# Allegro board fpga_ccd.brd
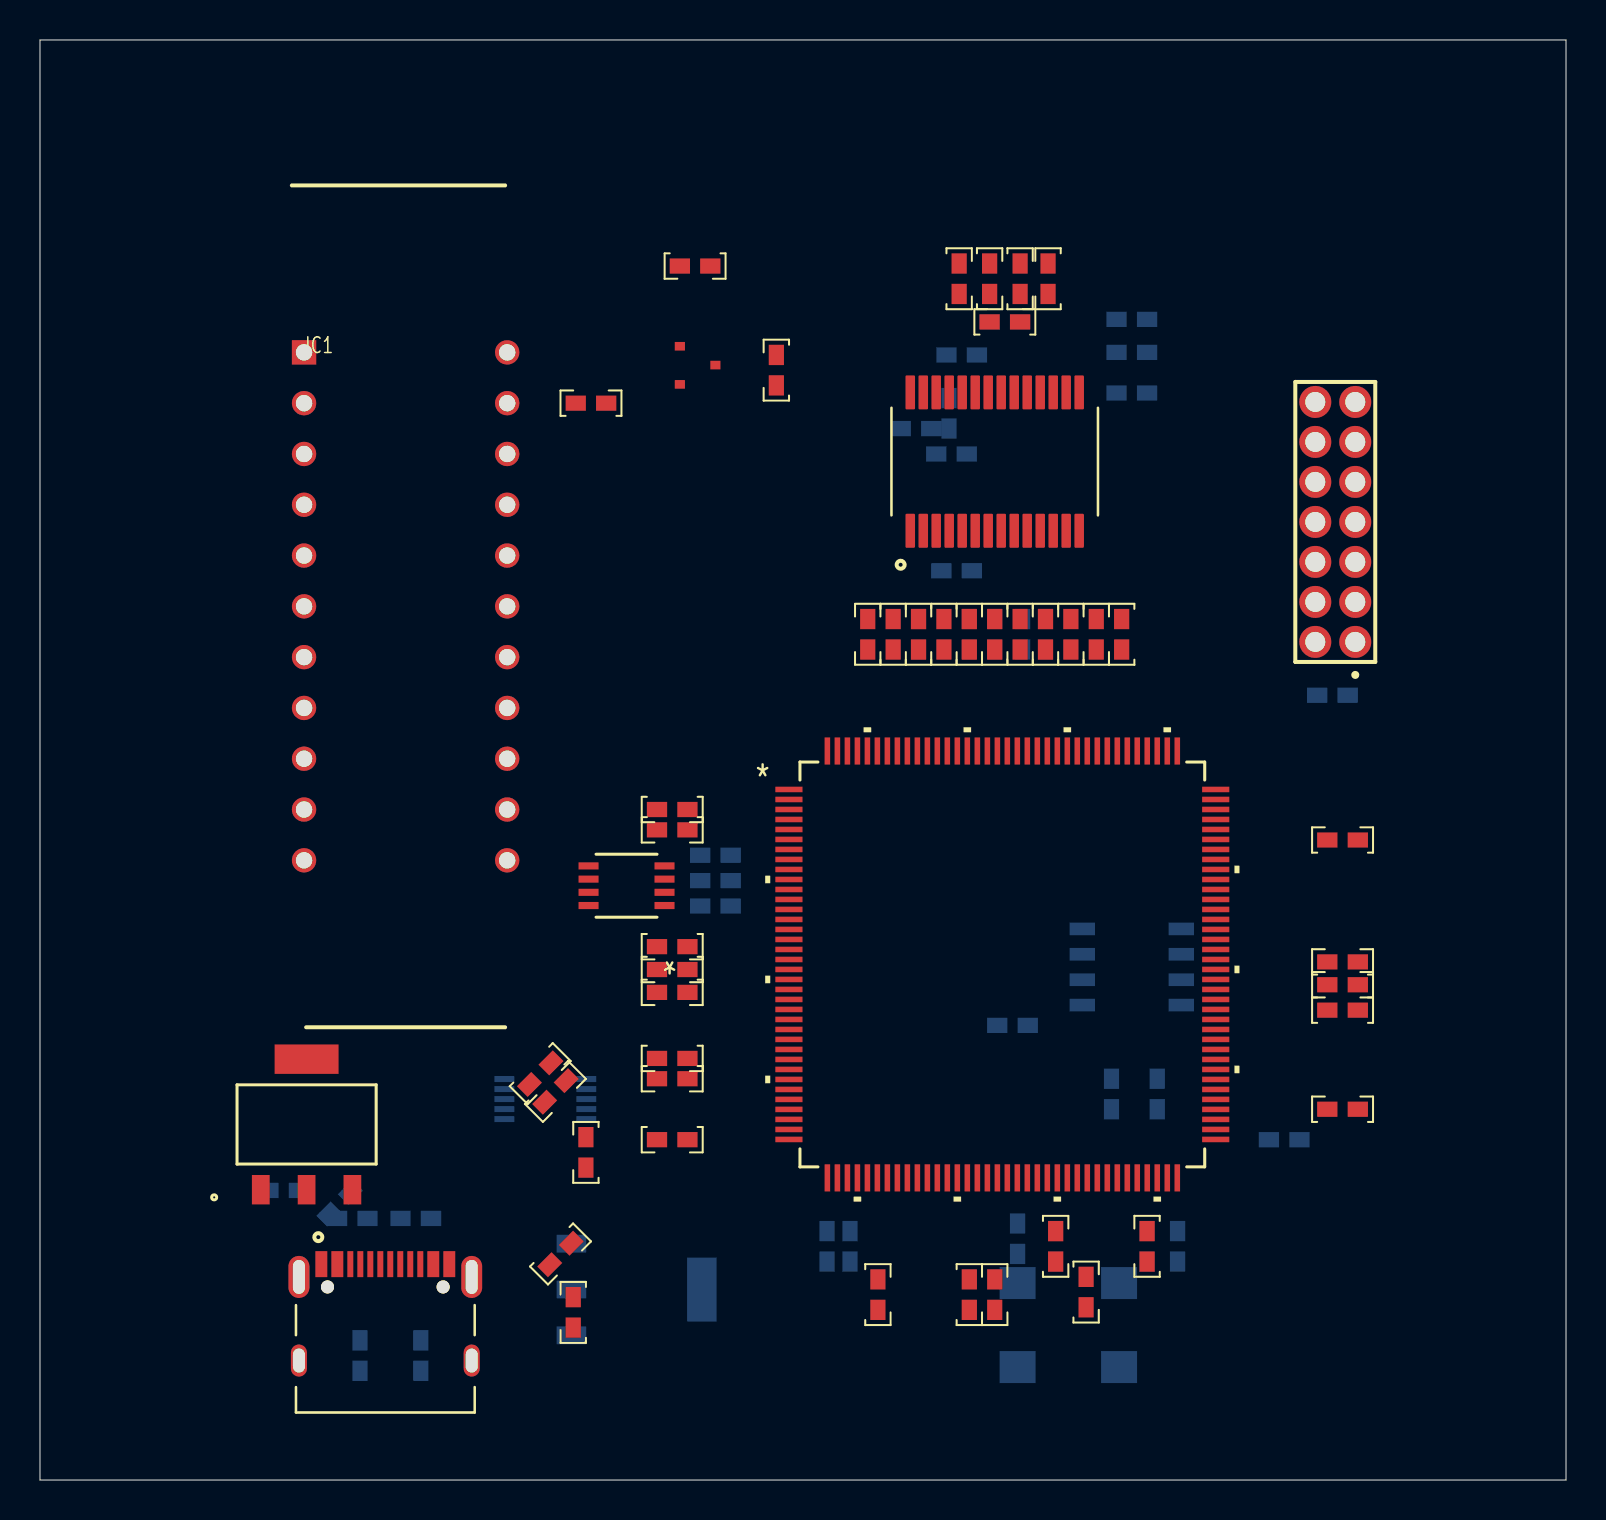
[diagram p0: board, top side]
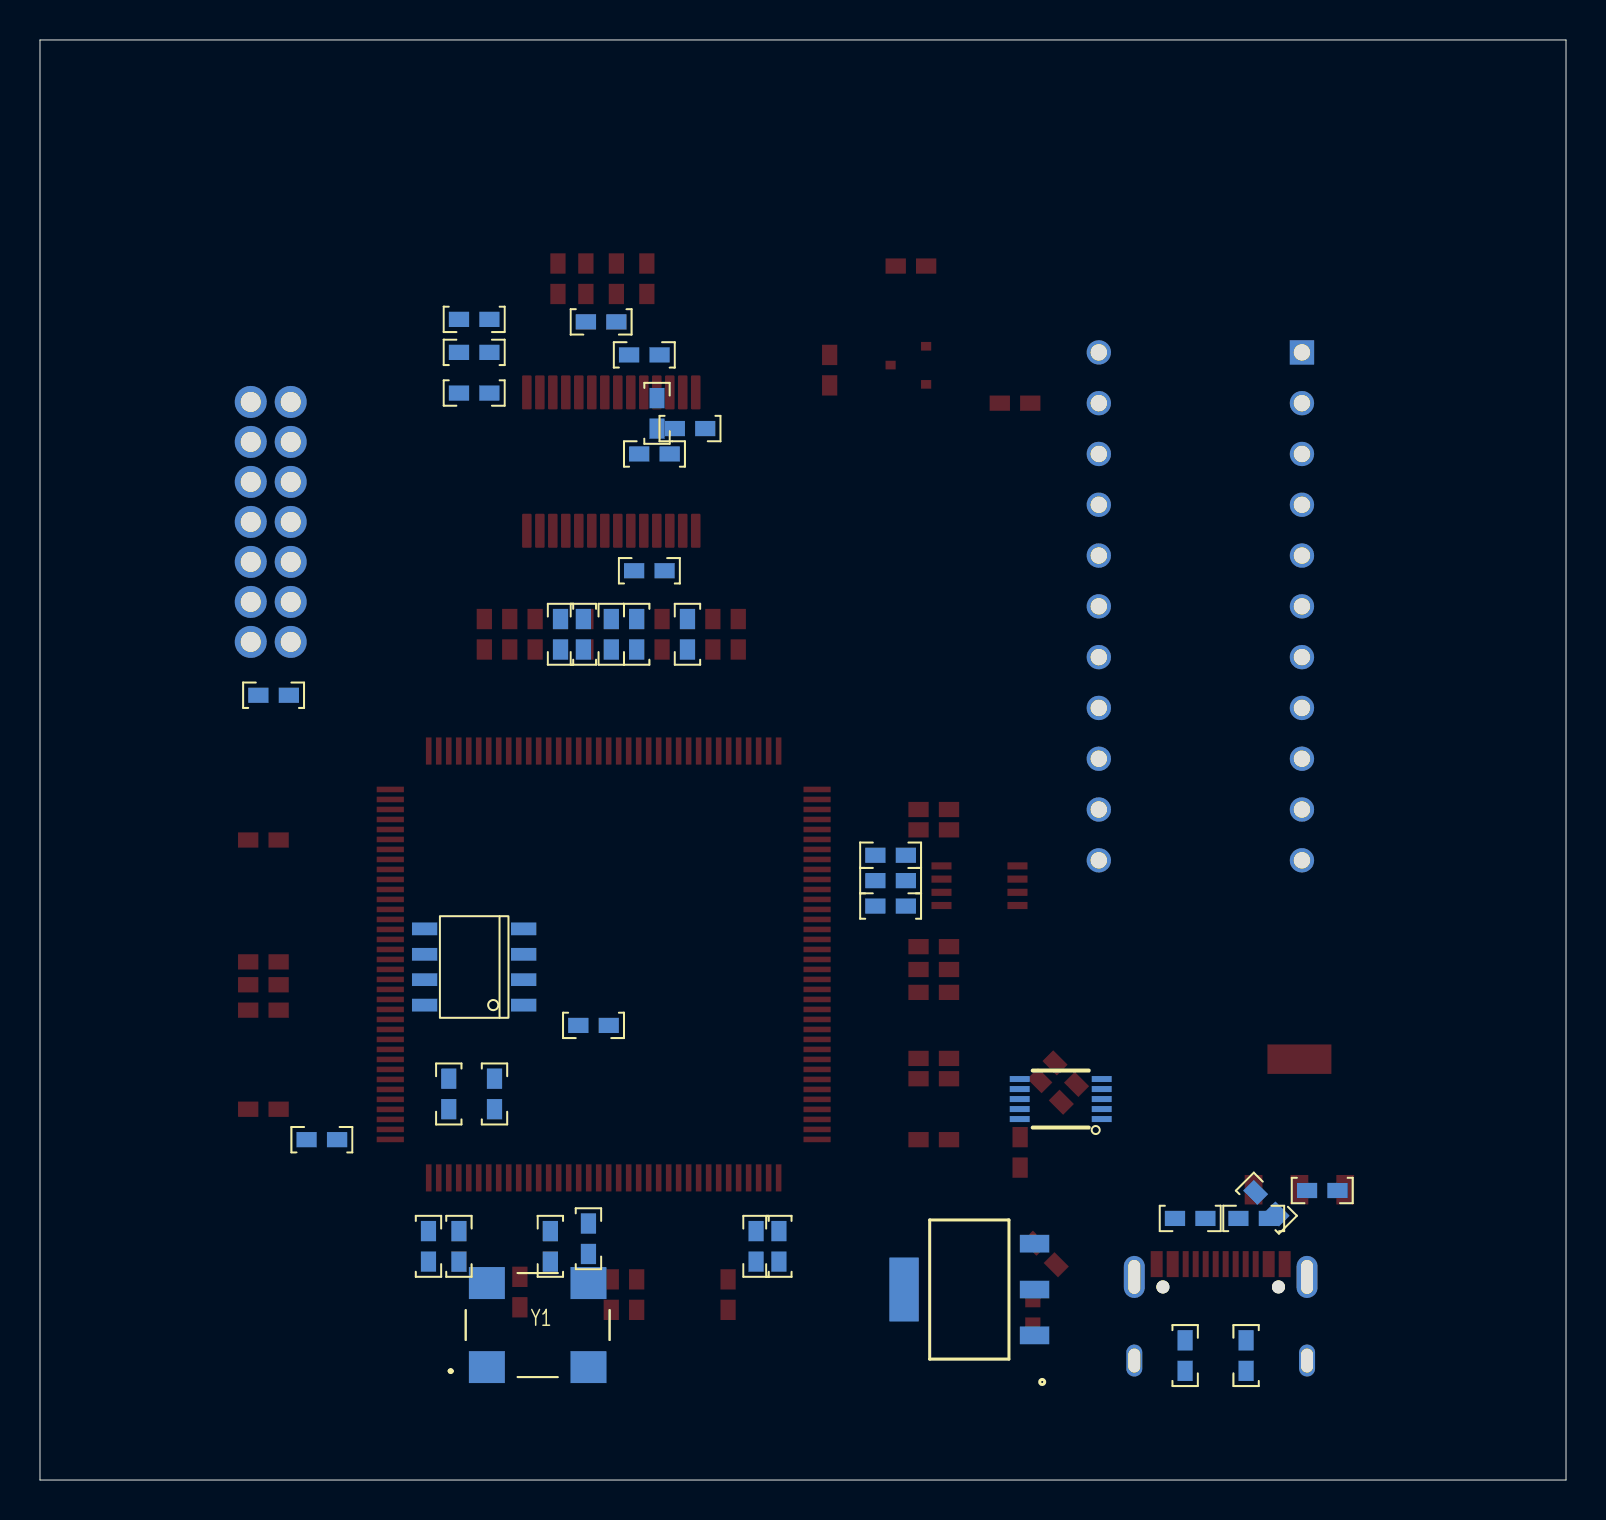
[diagram p1: board, bottom side, seen from below]

Outline 76.33 x 72.01 mm; copper layers: TOP, BOTTOM. Coordinates in mm from the lower left corner of the outline.
Outline path: 0,72.01 76.33,72.01 76.33,0 0,0 0,72.01

## Design rules (mm)
constraint set DEFAULT: min track width 0.127
net group ADCCLK: nets ADCCLK N43709
net group CCD_ICG: nets CCD_ICG N45930
net group CCD_MASTER: nets CCD_MASTER N46162
net group CCD_SH: nets CCD_SH N46224
net group CDSCLK1: nets CDSCLK1 N43637
net group CDSCLK2: nets CDSCLK2 N43673
net group CLK_50M: nets CLK_50M N10342
net group HT82V38_D1: nets HT82V38_D1 N42829
net group HT82V38_D2: nets HT82V38_D2 N42835
net group HT82V38_D3: nets HT82V38_D3 N42817
net group HT82V38_D4: nets HT82V38_D4 N42805
net group HT82V38_D5: nets HT82V38_D5 N42799
net group HT82V38_D6: nets HT82V38_D6 N42811
net group HT82V38_D7: nets HT82V38_D7 N42841
net group N39901: nets N39901 N39920
net group N45186: nets N45080 N45186
net group SCLK: nets N39538 SCLK
net group SDATA: nets N39540 SDATA
net group SLOAD: nets N39536 SLOAD
net group SPI_FLASH_MISO: nets N10587 SPI_FLASH_MISO
net group SPI_FLASH_MOSI: nets N10677 SPI_FLASH_MOSI
net group USB_D: nets USB_D+ USB_D-
net group CCD_OS: nets CCD_OS N41358 N41362

## Placement (name value [footprint] x y rotation side)
C1  10uF  [0603RF_WV_12D]  26.67 8.38 90 top
C2  10uF  [0603RF_WV_12D]  31.62 33.53 180 top
C3  100nF  [0603RF_WV_12D]  31.62 24.38 180 top
C4  100nF  [0603RF_WV_12D]  31.62 17.02 180 top
C5  100nF  [0603RF_WV_12D]  50.29 42.29 90 bottom
C6  100nF  [0603RF_WV_12D]  41.91 9.27 270 top
C7  100nF  [0603RF_WV_12D]  47.75 9.27 270 top
C8  100nF  [0603RF_WV_12D]  52.32 9.4 270 top
C9  100nF  [0603RF_WV_12D]  65.15 23.5 0 top
C10  100nF  [0603RF_WV_12D]  65.15 25.91 0 top
C11  100nF  [0603RF_WV_12D]  65.15 32 0 top
C12  10uF  [0603RF_WV_12D]  26.04 11.3 225 top
C13  100nF  [0603RF_WV_12D]  49.15 42.29 90 bottom
C14  100nF  [0603RF_WV_12D]  46.48 42.29 90 bottom
C15  10uF  [0603RF_WV_12D]  12.19 14.48 0 bottom
C16  10uF  [0603RF_WV_12D]  47.75 42.29 90 bottom
C17  100nF  [0603RF_WV_12D]  65.15 24.77 0 top
C18  100nF  [0603RF_WV_12D]  31.62 20.07 180 top
C19  100nF  [0603RF_WV_12D]  31.62 21.08 180 top
C20  100nF  [0603RF_WV_12D]  31.62 25.53 180 top
C21  100nF  [0603RF_WV_12D]  46.48 9.27 270 top
C22  100nF  [0603RF_WV_12D]  43.94 42.29 90 bottom
C23  100nF  [0603RF_WV_12D]  31.62 26.67 180 top
C24  100nF  [0603RF_WV_12D]  65.15 18.54 0 top
C25  100nF  [0603RF_WV_12D]  31.62 32.51 180 top
C26  10uF  [0603RF_WV_12D]  14.99 13.84 225 bottom
C27  100nF  [0603RF_WV_12D]  64.64 39.24 180 bottom
C28  100nF  [0603RF_WV_12D]  27.3 16.38 90 top
C29  10uF  [0603RF_WV_12D]  25.78 19.43 225 top
C30  10uF  [0603RF_WV_12D]  25.02 20.32 225 top
C31  100nF  [0603RF_WV_12D]  43.81 52.58 0 bottom
C32  100nF  [0603RF_WV_12D]  50.42 60.07 90 top
C33  100nF  [0603RF_WV_12D]  45.85 45.47 180 bottom
C34  100nF  [0603RF_WV_12D]  47.5 60.07 270 top
C35  100nF  [0603RF_WV_12D]  49.02 60.07 270 top
C36  100nF  [0603RF_WV_12D]  48.26 57.91 0 top
C37  10uF  [0603RF_WV_12D]  48.26 57.91 0 bottom
C38  100nF  [0603RF_WV_12D]  45.97 60.07 270 top
IC1  TCD1304DG_8Z_AW_  [DIP1016W62P254L4160H372Q22N]  13.21 56.39 0 top
J1  CONN SOCKET 7x2  [CONN_BULK_HEADER_2X7_2_2]  65.79 41.91 90 top
J2  CQ-USB-C16PSMT01  [SHENZHEN-CHUANGQIN-TECHNOLO]  17.27 10.79 0 top
Q1  2SA1015  [SOT23]  32.89 55.75 0 top
R1  4.7K  [0603RF_WV_12D]  62.23 17.02 180 bottom
R2  4.7K  [0603RF_WV_12D]  56.9 11.68 270 bottom
R3  4.7K  [0603RF_WV_12D]  39.37 11.68 90 bottom
R4  4.7K  [0603RF_WV_12D]  40.51 11.68 90 bottom
R5  33  [0603RF_WV_12D]  48.9 12.06 270 bottom
R6  4.7K  [0603RF_WV_12D]  48.64 22.73 0 bottom
R7  33  [0603RF_WV_12D]  53.59 19.3 270 bottom
R8  33  [0603RF_WV_12D]  55.88 19.3 90 bottom
R9  NC  [0603RF_WV_12D]  46.1 56.26 180 bottom
R10  NC  [0603RF_WV_12D]  45.59 51.31 180 bottom
R11  33R  [0603RF_WV_12D]  45.21 42.29 90 top
R12  33R  [0603RF_WV_12D]  46.48 42.29 90 top
R13  33R  [0603RF_WV_12D]  47.75 42.29 90 top
R14  33R  [0603RF_WV_12D]  49.02 42.29 90 top
R15  33R  [0603RF_WV_12D]  50.29 42.29 90 top
R16  33R  [0603RF_WV_12D]  51.56 42.29 90 top
R17  33R  [0603RF_WV_12D]  52.83 42.29 90 top
R18  33R  [0603RF_WV_12D]  54.1 42.29 90 top
R19  33R  [0603RF_WV_12D]  54.61 54.36 0 bottom
R20  33R  [0603RF_WV_12D]  54.61 56.39 180 bottom
R21  33R  [0603RF_WV_12D]  54.61 58.04 0 bottom
R22  33R  [0603RF_WV_12D]  41.4 42.29 90 top
R23  33R  [0603RF_WV_12D]  42.67 42.29 90 top
R24  33R  [0603RF_WV_12D]  43.94 42.29 90 top
R25  150R  [0603RF_WV_12D]  27.56 53.85 0 top
R26  150R  [0603RF_WV_12D]  32.77 60.71 180 top
R27  150R  [0603RF_WV_12D]  36.83 55.5 90 top
R28  33R  [0603RF_WV_12D]  33.78 28.7 180 bottom
R29  33R  [0603RF_WV_12D]  33.78 29.97 180 bottom
R30  33R  [0603RF_WV_12D]  33.78 31.24 180 bottom
R31  5.1K  [0603RF_WV_12D]  16 6.22 90 bottom
R32  5.1K  [0603RF_WV_12D]  19.05 6.22 270 bottom
R33  45R  [0603RF_WV_12D]  18.8 13.08 0 bottom
R34  45R  [0603RF_WV_12D]  15.62 13.08 180 bottom
R35  1K  [0603RF_WV_12D]  45.47 53.34 270 bottom
R36  0R  [0603RF_WV_12D]  55.37 11.68 270 bottom
R37  NC  [0603RF_WV_12D]  55.37 11.68 90 top
R38  NC  [0603RF_WV_12D]  50.8 11.68 270 top
R39  1K  [0603RF_WV_12D]  50.8 11.68 90 bottom
U1  XC6SLX9-2TQG144C_A  [TQG144_XIL]  48.13 25.78 0 top
U2  AMS1117-1.2v  [SOT_AMS1117-2P5_AMS]  29.84 9.53 90 bottom
U3  AMS1117-3.3v  [SOT_AMS1117-2P5_AMS]  13.34 17.78 0 top
U4  M25P16-VMN6TPBA  [SOIC8]  54.61 25.65 0 bottom
U5  CH340E  [MSOP-10]  25.27 19.05 0 bottom
U6  HT82V38  [SSOP-28]  47.75 50.93 90 top
U7  TC7WH14FU  [SSOP-8]  29.34 29.72 180 top
Y1  50MHz  [SMD7050]  51.44 7.75 180 bottom

## Library data of the parts
C1-C38 = CAP NP
IC1 = TCD1304DG_8Z,AW_
J1 = CONN SOCKET 7x2
J2 = USB-C 16pin
Q1 = 2N6520
R1-R5 R7 R8 R36-R39 = RESISTOR
R6 = Res 0603
R9-R35 = R
U1 = XC6SLX9-2TQG144C: User Part Number: PN; Tolerance: TOL
U2 U3 = AMS1117: User Part Number: PN; Tolerance: TOL
U4 = M25P16-VMN6TPBA: Tolerance: ***; User Part Number: ***
U5 = CH340E
U6 = HT82V38
U7 = TC7WH14FU: User Part Number: PN; Tolerance: TOL
Y1 = Oscillator 4p

## Footprints (pads in the part's own frame, mm; a bottom-side part is the same pattern mirrored in y, then rotated)
0603RF_WV_12D
  rect 1.016x0.762 smd: 1(-0.762,0) 2(0.762,0)
CONN_BULK_HEADER_2X7_2_2
  round 1.6 hole 1.001: 1(0,0) 2(0,1.999) 3(1.999,0) 4(1.999,1.999) 5(4,0) 6(4,1.999) 7(5.999,0) 8(5.999,1.999) 9(8.001,0) 10(8.001,1.999) 11(10,0) 12(10,1.999) 13(11.999,0) 14(11.999,1.999)
DIP1016W62P254L4160H372Q22N
  rect 1.219x1.219 hole 0.82: 1(0,0)
  round 1.219 hole 0.82: 2(0,-2.54) 3(0,-5.08) 4(0,-7.62) 5(0,-10.16) 6(0,-12.7) 7(0,-15.24) 8(0,-17.78) 9(0,-20.32) 10(0,-22.86) 11(0,-25.4) 12(10.16,-25.4) 13(10.16,-22.86) 14(10.16,-20.32) 15(10.16,-17.78) 16(10.16,-15.24) 17(10.16,-12.7) 18(10.16,-10.16) 19(10.16,-7.62) 20(10.16,-5.08) 21(10.16,-2.54) 22(10.16,0)
MSOP-10
  rect 1.001x0.3 smd: 1(-2.05,1.001) 2(-2.05,0.5) 3(-2.05,0) 4(-2.05,-0.5) 5(-2.05,-1.001) 6(2.05,-1.001) 7(2.05,-0.5) 8(2.05,0) 9(2.05,0.5) 10(2.05,1.001)
SHENZHEN-CHUANGQIN-TECHNOLO
  round 0.65 hole 0.65 unplated: (-2.891,-1.14) (2.891,-1.14)
  rect 0.599x1.3 smd: A1_B12(-3.2,0) A4_B9(-2.4,0) B1_A12(3.2,0) B4_A9(2.4,0)
  rect 0.3x1.3 smd: A5(-1.25,0) A6(-0.249,0) A7(0.249,0) A8(1.25,0) B5(1.75,0) B6(0.749,0) B7(-0.749,0) B8(-1.75,0)
  oval 1.049x2.101 hole 0.599x1.699: S1(-4.321,-0.64) S2(4.321,-0.64)
  oval 0.8x1.6 hole 0.599x1.199: S3(-4.321,-4.821) S4(4.321,-4.821)
SMD7050
  rect 1.801x1.6 smd: 1(-2.54,-2.101) 2(2.54,-2.101) 3(2.54,2.101) 4(-2.54,2.101)
SOIC8
  rect 1.27x0.635 smd: 1(-2.477,1.905) 2(-2.477,0.635) 3(-2.477,-0.635) 4(-2.477,-1.905) 5(2.477,-1.905) 6(2.477,-0.635) 7(2.477,0.635) 8(2.477,1.905)
SOT23
  rect 0.508x0.432 smd: 1(-0.889,0.94) 2(-0.889,-0.965) 3(0.889,0)
SOT_AMS1117-2P5_AMS
  rect 0.889x1.473 smd: 1(-2.291,-3.264) 2(0,-3.264) 3(2.291,-3.264)
  rect 3.2x1.473 smd: 4(0,3.264)
SSOP-8
  rect 1.003x0.356 smd: 1(-1.9,0.991) 2(-1.9,0.33) 3(-1.9,-0.33) 4(-1.9,-0.991) 5(1.9,-0.991) 6(1.9,-0.33) 7(1.9,0.33) 8(1.9,0.991)
SSOP-28
  custom 1.702x0.478 smd: 1(-3.459,4.224) 2(-3.459,3.574) 3(-3.459,2.926) 4(-3.459,2.276) 5(-3.459,1.626) 6(-3.459,0.975) 7(-3.459,0.325) 8(-3.459,-0.325) 9(-3.459,-0.975) 10(-3.459,-1.626) 11(-3.459,-2.276) 12(-3.459,-2.926) 13(-3.459,-3.574) 14(-3.459,-4.224) 15(3.459,-4.224) 16(3.459,-3.574) 17(3.459,-2.926) 18(3.459,-2.276) 19(3.459,-1.626) 20(3.459,-0.975) 21(3.459,-0.325) 22(3.459,0.325) 23(3.459,0.975) 24(3.459,1.626) 25(3.459,2.276) 26(3.459,2.926) 27(3.459,3.574) 28(3.459,4.224)
TQG144_XIL
  rect 1.359x0.279 smd: 1(-10.673,8.75) 2(-10.673,8.25) 3(-10.673,7.75) 4(-10.673,7.249) 5(-10.673,6.749) 6(-10.673,6.251) 7(-10.673,5.751) 8(-10.673,5.25) 9(-10.673,4.75) 10(-10.673,4.249) 11(-10.673,3.749) 12(-10.673,3.251) 13(-10.673,2.751) 14(-10.673,2.25) 15(-10.673,1.75) 16(-10.673,1.25) 17(-10.673,0.749) 18(-10.673,0.249) 19(-10.673,-0.249) 20(-10.673,-0.749) 21(-10.673,-1.25) 22(-10.673,-1.75) 23(-10.673,-2.25) 24(-10.673,-2.751) 25(-10.673,-3.251) 26(-10.673,-3.749) 27(-10.673,-4.249) 28(-10.673,-4.75) 29(-10.673,-5.25) 30(-10.673,-5.751) 31(-10.673,-6.251) 32(-10.673,-6.749) 33(-10.673,-7.249) 34(-10.673,-7.75) 35(-10.673,-8.25) 36(-10.673,-8.75) 73(10.673,-8.75) 74(10.673,-8.25) 75(10.673,-7.75) 76(10.673,-7.249) 77(10.673,-6.749) 78(10.673,-6.251) 79(10.673,-5.751) 80(10.673,-5.25) 81(10.673,-4.75) 82(10.673,-4.249) 83(10.673,-3.749) 84(10.673,-3.251) 85(10.673,-2.751) 86(10.673,-2.25) 87(10.673,-1.75) 88(10.673,-1.25) 89(10.673,-0.749) 90(10.673,-0.249) 91(10.673,0.249) 92(10.673,0.749) 93(10.673,1.25) 94(10.673,1.75) 95(10.673,2.25) 96(10.673,2.751) 97(10.673,3.251) 98(10.673,3.749) 99(10.673,4.249) 100(10.673,4.75) 101(10.673,5.25) 102(10.673,5.751) 103(10.673,6.251) 104(10.673,6.749) 105(10.673,7.249) 106(10.673,7.75) 107(10.673,8.25) 108(10.673,8.75)
  rect 0.279x1.359 smd: 37(-8.75,-10.673) 38(-8.25,-10.673) 39(-7.75,-10.673) 40(-7.249,-10.673) 41(-6.749,-10.673) 42(-6.251,-10.673) 43(-5.751,-10.673) 44(-5.25,-10.673) 45(-4.75,-10.673) 46(-4.249,-10.673) 47(-3.749,-10.673) 48(-3.251,-10.673) 49(-2.751,-10.673) 50(-2.25,-10.673) 51(-1.75,-10.673) 52(-1.25,-10.673) 53(-0.749,-10.673) 54(-0.249,-10.673) 55(0.249,-10.673) 56(0.749,-10.673) 57(1.25,-10.673) 58(1.75,-10.673) 59(2.25,-10.673) 60(2.751,-10.673) 61(3.251,-10.673) 62(3.749,-10.673) 63(4.249,-10.673) 64(4.75,-10.673) 65(5.25,-10.673) 66(5.751,-10.673) 67(6.251,-10.673) 68(6.749,-10.673) 69(7.249,-10.673) 70(7.75,-10.673) 71(8.25,-10.673) 72(8.75,-10.673) 109(8.75,10.673) 110(8.25,10.673) 111(7.75,10.673) 112(7.249,10.673) 113(6.749,10.673) 114(6.251,10.673) 115(5.751,10.673) 116(5.25,10.673) 117(4.75,10.673) 118(4.249,10.673) 119(3.749,10.673) 120(3.251,10.673) 121(2.751,10.673) 122(2.25,10.673) 123(1.75,10.673) 124(1.25,10.673) 125(0.749,10.673) 126(0.249,10.673) 127(-0.249,10.673) 128(-0.749,10.673) 129(-1.25,10.673) 130(-1.75,10.673) 131(-2.25,10.673) 132(-2.751,10.673) 133(-3.251,10.673) 134(-3.749,10.673) 135(-4.249,10.673) 136(-4.75,10.673) 137(-5.25,10.673) 138(-5.751,10.673) 139(-6.251,10.673) 140(-6.749,10.673) 141(-7.249,10.673) 142(-7.75,10.673) 143(-8.25,10.673) 144(-8.75,10.673)

## Nets
1V2: C1.2 C16.1 C17.1 C18.1 C19.1 C20.1 C21.1 U1.19 U1.28 U1.52 U1.89 U1.128 U2.2 U2.4(\VOUT\)
3V3: C2.1 C3.1 C4.1 C5.1 C6.1 C7.1 C8.1 C9.1 C10.1 C11.1 C13.1 C14.1 C15.2 C22.1 C23.1 C24.1 C25.1 C27.2 C31.1 C32.1 C33.1 IC1.1(\VDD\) IC1.2 J1.2 R2.2 R3.1 R4.1 R6.1 R27.1 R36.2 R38.2 U1.4 U1.18 U1.20 U1.31 U1.36 U1.42 U1.53 U1.63 U1.76 U1.86 U1.90 U1.103(\VCCO_1_2\) U1.122 U1.125 U1.129 U1.135 U3.2 U3.4(\VOUT\) U4.3(\W-\) U4.7 U4.8 U6.5 U6.18 U6.28 U7.8(\VCC\) Y1.4(\VCC\)
5V: C12.1 C26.1 C29.1 C30.1 J2.A4_B9 J2.B4_A9(\VBUS#B4_A9\) U2.3 U3.3 U5.7(\VCC\)
GND_POWER: C1.1 C2.2 C3.2 C4.2 C5.2 C6.2 C7.2 C8.2 C9.2 C10.2 C11.2 C12.2 C13.2 C14.2 C15.1 C16.2 C17.2 C18.2 C19.2 C20.2 C21.2 C22.2 C23.2 C24.2 C25.2 C26.2 C27.1 C28.1 C29.2 C30.2 C31.2 C32.2 C33.2 C34.1 C35.1 C38.1 IC1.6 IC1.7 IC1.8 IC1.9 IC1.10 IC1.11 IC1.12 IC1.13 IC1.14 IC1.15 IC1.16 IC1.17 IC1.18 IC1.19 IC1.20 IC1.22 J1.1 J1.3 J1.5 J1.7 J1.9 J1.11 J1.13 J2.A1_B12 J2.B1_A12 J2.S1 J2.S2 J2.S3 J2.S4 R1.1 R26.1 R31.1 R32.2 R33.2 R34.2 R35.2 R37.1 R39.1 U1.3 U1.13 U1.25 U1.49 U1.54 U1.68 U1.77 U1.91 U1.96 U1.108 U1.113 U1.130 U1.136 U2.1 U3.1 U4.4 U5.3 U6.4 U6.6 U6.19 U6.27 U7.4 Y1.2
ADCCLK: R24.1 U1.138
CCD_ICG: R30.1 U1.9
CCD_MASTER: R28.1 U1.11
CCD_OS: Q1.3 R9.2 R10.2 R27.2 U6.26(\VINR\)
CCD_SH: R29.1 U1.10
CDSCLK1: R22.1 U1.140
CDSCLK2: R23.1 U1.139
CLK_50M: R5.1 U1.56
HT82V38_D0: R18.1 U1.114
HT82V38_D1: R17.1 U1.115
HT82V38_D2: R16.1 U1.116
HT82V38_D3: R15.1 U1.117
HT82V38_D4: R14.1 U1.118
HT82V38_D5: R13.1 U1.119
HT82V38_D6: R12.1 U1.120
HT82V38_D7: R11.1 U1.121
M0: R36.1 R37.2 U1.69
M1: R38.1 R39.2 U1.60
SCLK: R20.2 U1.143
SDATA: R19.2 U1.142
SLOAD: R21.2 U1.144
SPI_FLASH_CLK: U1.70 U4.6
SPI_FLASH_CSO: R6.2 U1.38 U4.1
SPI_FLASH_MISO: R7.2 U1.65
SPI_FLASH_MOSI: R8.1 U1.64
TCK_F: J1.6 U1.109
TDI_F: J1.10 U1.110
TDO_F: J1.8 U1.106
TMS_F: J1.4(9) U1.107
UART_RXD: U1.32 U5.8
UART_TXD: U1.33 U5.9
USB_D+: J2.A6 J2.B6 R33.1 U5.1
USB_D-: J2.A7 J2.B7 R34.1 U5.2
N00968: R4.2 U1.39
N10342: R5.2 Y1.3
N10587: R7.1 U4.2
N10677: R8.2 U4.5
N14884: R3.2 U1.37
N15354: R1.2 U1.73
N15645: R2.1 U1.72
N29928: C28.2 U5.10
N39536: R21.1 U6.17
N39538: R20.1 U6.16
N39540: R19.1 U6.15
N39901: C35.2 C36.2 C37.2 U6.20
N39920: C34.2 C36.1 C37.1 U6.21
N40100: C38.2 U6.23
N41358: R10.1 U6.24
N41362: R9.1 U6.22
N41426: R35.1 U6.25
N42799: R13.2 U6.9
N42805: R14.2 U6.10
N42811: R12.2 U6.8
N42817: R15.2 U6.11
N42823: R18.2 U6.14
N42829: R17.2 U6.13
N42835: R16.2 U6.12
N42841: R11.2 U6.7
N43637: R22.2 U6.1
N43673: R23.2 U6.2
N43709: R24.2 U6.3
N45080: IC1.21 R25.1
N45186: Q1.2 R25.2
N45216: Q1.1(\EMITTER\) R26.2
N45901: IC1.5 U7.5
N45905: IC1.3 U7.2
N45930: R30.2 U7.6
N46162: R28.2 U7.1
N46224: R29.2 U7.3
N46412: IC1.4 U7.7
N48976: J2.B5 R32.1
N49298: J2.A5 R31.2
N49459: J2.A8 J2.B8

Pads without a net: J1 12 14; U1 1 2 5 6 7 8 12 14 15 16 17 21 22 23 24 26 27 29 30 34 35 40 41 43 44 45 46 47 48 50 51 55 57 58 59 61 62 66 67 71 74 75 78 79 80 81 82 83 84 85 87 88 92 93 94 95 97 98 99 100 101 102 104 105 111 112 123 124 126 127 131 132 133 134 137 141; U5 4 5 6; Y1 1

## Routing (per net, layer and track width the routed paths; a pad name or vN(x,y) marks a point on that pad's centre or on a via; arc(x,y) is an arc through that point)
1V2: length 1.3
  TOP w0.305: 46.48,10.03 46.35,9.91 ; C17.1 64.52,24.64 ; C18.1 32.26,20.19 ; C19.1 32.26,21.21 ; C1.2 26.8,9.02 ; C20.1 32.26,25.65
  BOTTOM w0.305: C16.1 47.62,41.66
3V3: length 5
  TOP w0.305: C4.1 32.26,17.14 ; 47.75,10.03 47.62,9.91 ; C11.1 64.52,31.88 ; C10.1 64.52,25.78 ; C32.1 50.55,59.44 ; C25.1 32.26,32.64 ; R38.2 50.67,11.05 ; C23.1 32.26,26.8 ; C3.1 32.26,24.51 ; 41.91,10.03 41.78,9.91 ; C2.1 32.26,33.66 ; C9.1 64.52,23.37 ; C8.1 52.2,10.03 ; C24.1 64.52,18.41 ; R27.1 36.96,54.86
  BOTTOM w0.305: R6.1 48.01,22.86 ; C14.1 46.35,41.66 ; R2.2 57.02,11.05 ; C22.1 43.81,41.66 ; R4.1 40.39,11.05 ; R36.2 55.5,11.05 ; C5.1 50.16,41.66 ; R3.1 39.24,11.05 ; C15.2 12.83,14.61 ; C13.1 49.02,41.66 ; C27.2 64.01,39.12 ; C33.1 46.48,45.34 ; C31.1 43.18,52.7
5V: length 0.7
  TOP w0.305: C30.1 25.38,20.86 ; C12.1 26.39,11.84 ; C29.1 26.14,19.97
  BOTTOM w0.305: C26.1 15.52,14.2
GND_POWER: length 8.1
  TOP w0.305: C2.2 30.99,33.66 ; C35.1 48.9,60.71 ; C10.2 65.79,25.78 ; C12.2 25.5,10.94 ; C34.1 47.37,60.71 ; C29.2 25.24,19.07 ; C21.2 46.35,8.64 ; C17.2 65.79,24.64 ; C20.2 30.99,25.65 ; C18.2 30.99,20.19 ; C1.1 26.8,7.75 ; C25.2 30.99,32.64 ; C3.2 30.99,24.51 ; C7.2 47.62,8.64 ; C30.2 24.48,19.96 ; C38.1 45.85,60.71 ; C4.2 30.99,17.14 ; C11.2 65.79,31.88 ; C23.2 30.99,26.8 ; R26.1 33.4,60.83 ; C28.1 27.43,15.75 ; C32.2 50.55,60.71 ; C8.2 52.2,8.76 ; C6.2 41.78,8.64 ; C19.2 30.99,21.21 ; C24.2 65.79,18.41 ; C9.2 65.79,23.37 ; R37.1 55.5,11.05
  BOTTOM w0.305: R35.2 45.59,52.7 ; C26.2 14.63,13.3 ; R39.1 50.67,11.05 ; C16.2 47.62,42.93 ; C22.2 43.81,42.93 ; C13.2 49.02,42.93 ; R1.1 62.87,16.89 ; R32.2 19.18,5.59 ; C31.2 44.45,52.7 ; C5.2 50.16,42.93 ; C14.2 46.35,42.93 ; R34.2 14.99,12.95 ; R31.1 15.88,5.59 ; C15.1 11.56,14.61 ; C33.2 45.21,45.34 ; C27.1 65.28,39.12 ; R33.2 19.43,13.21
ADCCLK: length 0.2
  TOP w0.305: R24.1 44.07,41.66
CCD_ICG: length 0.2
  BOTTOM w0.305: R30.1 34.42,31.11
CCD_MASTER: length 0.2
  BOTTOM w0.305: R28.1 34.42,28.57
CCD_OS: length 0.5
  TOP w0.305: R27.2 36.96,56.13
  BOTTOM w0.305: R9.2 45.47,56.13 ; R10.2 44.96,51.18
CCD_SH: length 0.2
  BOTTOM w0.305: R29.1 34.42,29.84
CDSCLK1: length 0.2
  TOP w0.305: R22.1 41.53,41.66
CDSCLK2: length 0.2
  TOP w0.305: R23.1 42.8,41.66
CLK_50M: length 0.2
  BOTTOM w0.305: R5.1 49.02,12.7
HT82V38_D0: length 0.2
  TOP w0.305: R18.1 54.23,41.66
HT82V38_D1: length 0.2
  TOP w0.305: R17.1 52.96,41.66
HT82V38_D2: length 0.2
  TOP w0.305: R16.1 51.69,41.66
HT82V38_D3: length 0.2
  TOP w0.305: R15.1 50.42,41.66
HT82V38_D4: length 0.2
  TOP w0.305: R14.1 49.15,41.66
HT82V38_D5: length 0.2
  TOP w0.305: R13.1 47.88,41.66
HT82V38_D6: length 0.2
  TOP w0.305: R12.1 46.61,41.66
HT82V38_D7: length 0.2
  TOP w0.305: R11.1 45.34,41.66
M0: length 0.4
  TOP w0.305: R37.2 55.5,12.32
  BOTTOM w0.305: R37.2 55.5,12.32
M1: length 0.4
  TOP w0.305: R38.1 50.67,12.32
  BOTTOM w0.305: R38.1 50.67,12.32
SCLK: length 0.2
  BOTTOM w0.305: R20.2 53.98,56.26
SDATA: length 0.2
  BOTTOM w0.305: R19.2 55.24,54.48
SLOAD: length 0.2
  BOTTOM w0.305: R21.2 55.24,58.17
SPI_FLASH_CSO: length 0.2
  BOTTOM w0.305: R6.2 49.28,22.86
SPI_FLASH_MISO: length 0.2
  BOTTOM w0.305: R7.2 53.72,18.67
SPI_FLASH_MOSI: length 0.2
  BOTTOM w0.305: R8.1 55.75,18.67
USB_D+: length 0.2
  BOTTOM w0.305: R33.1 18.16,13.21
USB_D-: length 0.2
  BOTTOM w0.305: R34.1 16.26,12.95
N00968: length 0.2
  BOTTOM w0.305: R4.2 40.39,12.32
N10342: length 0.2
  BOTTOM w0.305: 48.9,11.3 49.02,11.43
N10587: length 0.2
  BOTTOM w0.305: R7.1 53.72,19.94
N10677: length 0.2
  BOTTOM w0.305: R8.2 55.75,19.94
N14884: length 0.2
  BOTTOM w0.305: R3.2 39.24,12.32
N15354: length 0.2
  BOTTOM w0.305: R1.2 61.59,16.89
N15645: length 0.2
  BOTTOM w0.305: R2.1 57.02,12.32
N29928: length 0.2
  TOP w0.305: C28.2 27.43,17.02
N39536: length 0.2
  BOTTOM w0.305: R21.1 53.98,58.17
N39538: length 0.2
  BOTTOM w0.305: R20.1 55.24,56.26
N39540: length 0.2
  BOTTOM w0.305: R19.1 53.98,54.48
N39901: length 0.5
  TOP w0.305: C35.2 48.9,59.44 ; C36.2 48.9,57.78
  BOTTOM w0.305: C36.2 48.9,58.04
N39920: length 0.5
  TOP w0.305: C34.2 47.37,59.44 ; C36.1 47.62,57.78
  BOTTOM w0.305: C36.1 47.62,58.04
N40100: length 0.2
  TOP w0.305: C38.2 45.85,59.44
N41358: length 0.2
  BOTTOM w0.305: R10.1 46.23,51.18
N41362: length 0.2
  BOTTOM w0.305: R9.1 46.74,56.13
N41426: length 0.2
  BOTTOM w0.305: R35.1 45.59,53.98
N42799: length 0.2
  TOP w0.305: R13.2 47.88,42.93
N42805: length 0.2
  TOP w0.305: R14.2 49.15,42.93
N42811: length 0.2
  TOP w0.305: R12.2 46.61,42.93
N42817: length 0.2
  TOP w0.305: R15.2 50.42,42.93
N42823: length 0.2
  TOP w0.305: R18.2 54.23,42.93
N42829: length 0.2
  TOP w0.305: R17.2 52.96,42.93
N42835: length 0.2
  TOP w0.305: R16.2 51.69,42.93
N42841: length 0.2
  TOP w0.305: R11.2 45.34,42.93
N43637: length 0.2
  TOP w0.305: R22.2 41.53,42.93
N43673: length 0.2
  TOP w0.305: R23.2 42.8,42.93
N43709: length 0.2
  TOP w0.305: R24.2 44.07,42.93
N45080: length 0.2
  TOP w0.305: R25.1 26.92,53.72
N45186: length 0.2
  TOP w0.305: R25.2 28.19,53.72
N45216: length 0.2
  TOP w0.305: R26.2 32.13,60.83
N45930: length 0.2
  BOTTOM w0.305: R30.2 33.15,31.11
N46162: length 0.2
  BOTTOM w0.305: R28.2 33.15,28.57
N46224: length 0.2
  BOTTOM w0.305: R29.2 33.15,29.84
N48976: length 0.2
  BOTTOM w0.305: R32.1 19.18,6.86
N49298: length 0.2
  BOTTOM w0.305: R31.2 15.88,6.86
